# Altium PCB Laser.PcbDoc
Units mil, origin at the board's own origin, x right, y up, seen from the top; angles counter-clockwise.
Board outline 6560 x 3400 mil, 2 copper layers (Top Layer, Bottom Layer), stack 22.8 mil thick; 70 components, 105 nets, 239 pads, 6 vias.
Unrouted connection lines stored in the file: 4.
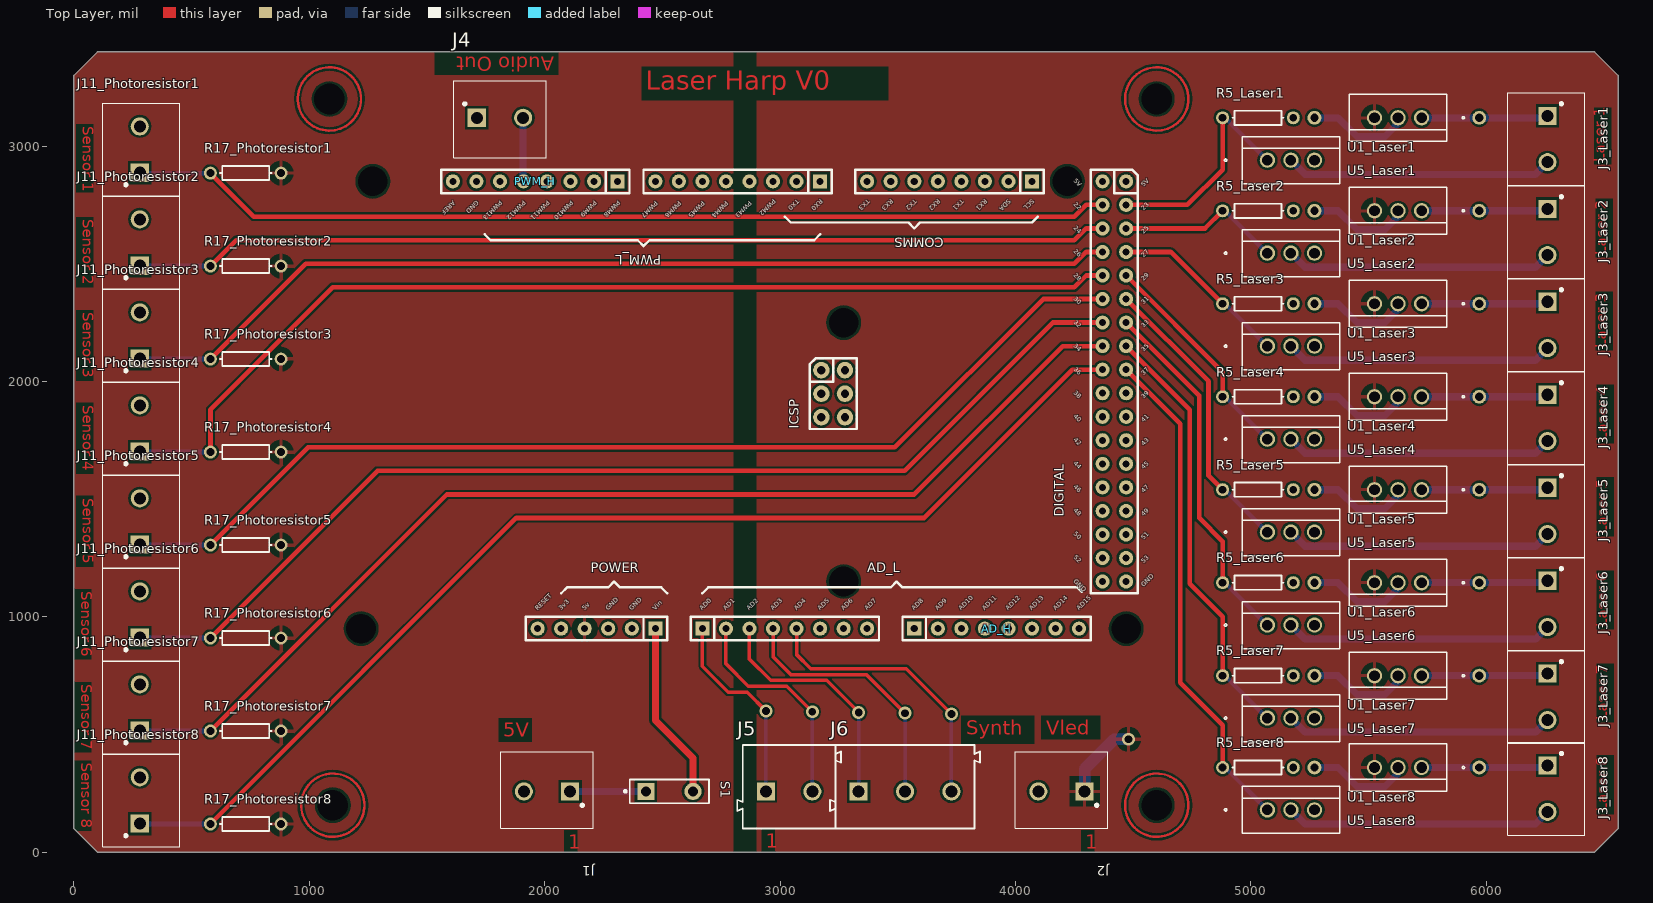
[diagram p0: Top Layer view]
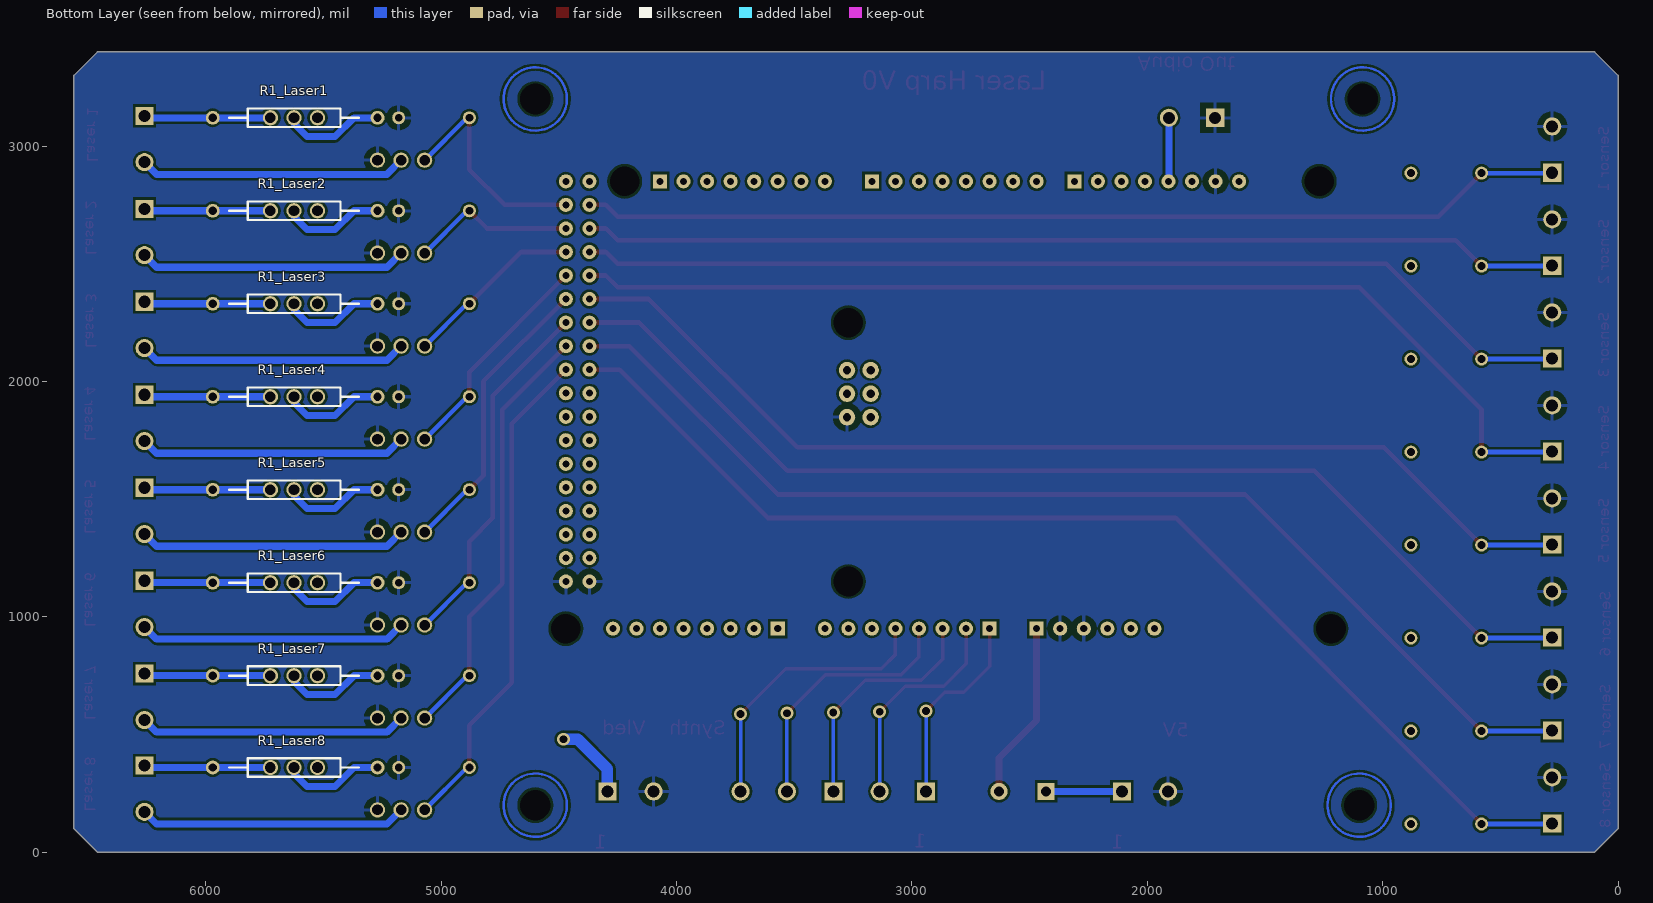
[diagram p1: Bottom Layer view, seen from below]
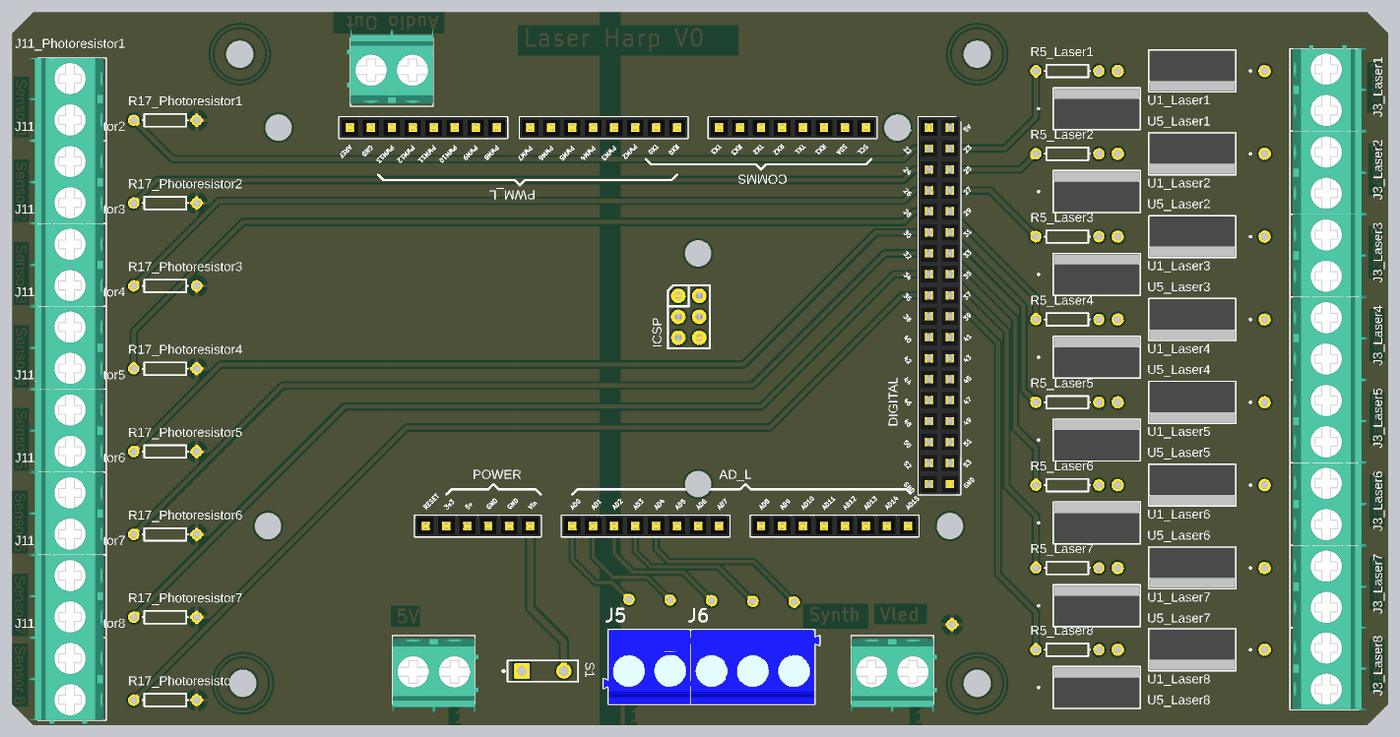
[diagram p2: 3D render of the assembled board from above, using the file's embedded part models]

## Layer stack, top to bottom
Top Solder: solder mask 0.4, Solder Resist, Dk 3.5
Top Layer: signal copper 1.4
Dielectric 1: dielectric 20, FR-4, Dk 4.8
Bottom Layer: signal copper 1.4
Bottom Solder: solder mask 0.4, Solder Resist, Dk 3.5

## Board outline
0,100 0,3300 100,3400 6460,3400 6560,3300 6560,100 6460,0 100,0

## Design rules (kind name [scope] priority, off if disabled: settings)
Clearance [All] p1: gap=10 ignorepadtopadclearanceinfootprint=FALSE except(0: Arc-Hole Track-Hole SMDPad-Hole THPad-Hole Via-Hole Fill-Hole Poly-Hole Region-Hole Text-Hole)
PolygonConnect [All] p1: connectstyle=Relief reliefconductorwidth=15 reliefentries=4 polygonreliefangle="90 Angle" airgapwidth=25
RoomDefinition U_uC [InComponentClass('U_uC')] p1: confinementstyle=ConfineIn formatcopy=TRUE lockcomponents=FALSE outline 950,1.47 4860,1.47 4860,3400 950,3400
RoomDefinition Photoresistor8 [InComponentClass('Photoresistor8')] p2: confinementstyle=ConfineIn formatcopy=TRUE lockcomponents=FALSE outline 0,0 1150,0 1150,550 0,550
RoomDefinition Photoresistor7 [InComponentClass('Photoresistor7')] p3: confinementstyle=ConfineIn formatcopy=TRUE lockcomponents=FALSE outline 0,395 1150,395 1150,945 0,945
RoomDefinition Photoresistor6 [InComponentClass('Photoresistor6')] p4: confinementstyle=ConfineIn formatcopy=TRUE lockcomponents=FALSE outline 0,790 1150,790 1150,1340 0,1340
RoomDefinition Photoresistor5 [InComponentClass('Photoresistor5')] p5: confinementstyle=ConfineIn formatcopy=TRUE lockcomponents=FALSE outline 0,1185 1150,1185 1150,1735 0,1735
RoomDefinition Photoresistor4 [InComponentClass('Photoresistor4')] p6: confinementstyle=ConfineIn formatcopy=TRUE lockcomponents=FALSE outline 0,1580 1150,1580 1150,2130 0,2130
RoomDefinition Photoresistor3 [InComponentClass('Photoresistor3')] p7: confinementstyle=ConfineIn formatcopy=TRUE lockcomponents=FALSE outline 0,1975 1150,1975 1150,2525 0,2525
RoomDefinition Photoresistor2 [InComponentClass('Photoresistor2')] p8: confinementstyle=ConfineIn formatcopy=TRUE lockcomponents=FALSE outline 0,2370 1150,2370 1150,2920 0,2920
RoomDefinition Photoresistor1 [InComponentClass('Photoresistor1')] p9: confinementstyle=ConfineIn formatcopy=TRUE lockcomponents=FALSE outline 0,2765 1150,2765 1150,3315 0,3315
RoomDefinition Laser_Harp_Top [InComponentClass('Laser_Harp_Top')] p10 off: confinementstyle=ConfineIn formatcopy=TRUE lockcomponents=FALSE outline -4900,-3950 -2900,-3950 -2900,-2950 -4900,-2950
RoomDefinition Laser8 [InComponentClass('Laser8')] p11: confinementstyle=ConfineIn formatcopy=TRUE lockcomponents=FALSE outline 4810,0 6570,0 6570,520 4810,520
RoomDefinition Laser7 [InComponentClass('Laser7')] p12: confinementstyle=ConfineIn formatcopy=TRUE lockcomponents=FALSE outline 4810,390 6570,390 6570,910 4810,910
RoomDefinition Laser6 [InComponentClass('Laser6')] p13: confinementstyle=ConfineIn formatcopy=TRUE lockcomponents=FALSE outline 4810,785 6570,785 6570,1305 4810,1305
RoomDefinition Laser5 [InComponentClass('Laser5')] p14: confinementstyle=ConfineIn formatcopy=TRUE lockcomponents=FALSE outline 4810,1180 6570,1180 6570,1700 4810,1700
RoomDefinition Laser4 [InComponentClass('Laser4')] p15: confinementstyle=ConfineIn formatcopy=TRUE lockcomponents=FALSE outline 4810,1575 6570,1575 6570,2095 4810,2095
RoomDefinition Laser3 [InComponentClass('Laser3')] p16: confinementstyle=ConfineIn formatcopy=TRUE lockcomponents=FALSE outline 4810,1970 6570,1970 6570,2490 4810,2490
RoomDefinition Laser2 [InComponentClass('Laser2')] p17: confinementstyle=ConfineIn formatcopy=TRUE lockcomponents=FALSE outline 4810,2365 6570,2365 6570,2885 4810,2885
RoomDefinition Laser1 [InComponentClass('Laser1')] p18: confinementstyle=ConfineIn formatcopy=TRUE lockcomponents=FALSE outline 4810,2760 6570,2760 6570,3280 4810,3280
RoutingVias [All] p1: holewidth=28 width=50 viastyle="Through Hole" minholewidth=28 minwidth=50 maxholewidth=40 maxwidth=60
SolderMaskExpansion [All] p1: expansion=4
Width [All] p1: maxlimit=50 minlimit=10 preferedwidth=20
30 further rules are at their usual default settings.

## Classes and differential pairs
net class SENSOR[8..1]: SENSOR1 SENSOR2 SENSOR3 SENSOR4 SENSOR5 SENSOR6 SENSOR7 SENSOR8
net class LASER[8..1]: LASER1 LASER2 LASER3 LASER4 LASER5 LASER6 LASER7 LASER8
channel class Photoresistors: Photoresistor1 Photoresistor2 Photoresistor3 Photoresistor4 Photoresistor5 Photoresistor6 Photoresistor7 Photoresistor8
component class U_uC: AD_H AD_L COMMS DIGITAL ICSP J4 J5 J6 POWER PWM_H PWM_L
component class Photoresistor8: J11_Photoresistor8 R17_Photoresistor8
component class Photoresistor7: J11_Photoresistor7 R17_Photoresistor7
component class Photoresistor6: J11_Photoresistor6 R17_Photoresistor6
component class Photoresistor5: J11_Photoresistor5 R17_Photoresistor5
component class Photoresistor4: J11_Photoresistor4 R17_Photoresistor4
component class Photoresistor3: J11_Photoresistor3 R17_Photoresistor3
component class Photoresistor2: J11_Photoresistor2 R17_Photoresistor2
component class Photoresistor1: J11_Photoresistor1 R17_Photoresistor1
channel class Lasers: Laser1 Laser2 Laser3 Laser4 Laser5 Laser6 Laser7 Laser8
component class Laser8: J3_Laser8 R1_Laser8 R5_Laser8 U1_Laser8 U5_Laser8
component class Laser7: J3_Laser7 R1_Laser7 R5_Laser7 U1_Laser7 U5_Laser7
component class Laser6: J3_Laser6 R1_Laser6 R5_Laser6 U1_Laser6 U5_Laser6
component class Laser5: J3_Laser5 R1_Laser5 R5_Laser5 U1_Laser5 U5_Laser5
component class Laser4: J3_Laser4 R1_Laser4 R5_Laser4 U1_Laser4 U5_Laser4
component class Laser3: J3_Laser3 R1_Laser3 R5_Laser3 U1_Laser3 U5_Laser3
component class Laser2: J3_Laser2 R1_Laser2 R5_Laser2 U1_Laser2 U5_Laser2
component class Laser1: J3_Laser1 R1_Laser1 R5_Laser1 U1_Laser1 U5_Laser1
component class Laser_Harp_Top: J1 J2 R? S1 U?

## Components (designator, comment, footprint, x,y, rotation, side; value= is the part's Value field where it differs from the comment)
AD_H "AD_H" "Header 8x1 8.5mm" 3570,950 r0 top locked
AD_L "AD_L" "Header 8x1 8.5mm" 2670,950 r0 top locked
COMMS "Communication" "Header 8x1 8.5mm" 4070,2850 r180 top
DIGITAL "IO_36" "HEADER 36X 8MM" 4470,2850 r270 top locked
ICSP "ICSP" ICSP 3175.51,2048.03 r0 top locked
J1 "1935161" PHOENIX_1935161 2010,258.43 r180 top
J2 "1935161" PHOENIX_1935161 4195.36,258.43 r180 top
J3_Laser1 "1935161" PHOENIX_1935161 6260,3030 r270 top (schematic designator J3)
J3_Laser2 "1935161" PHOENIX_1935161 6260,2635 r270 top (schematic designator J3)
J3_Laser3 "1935161" PHOENIX_1935161 6260,2240 r270 top (schematic designator J3)
J3_Laser4 "1935161" PHOENIX_1935161 6260,1845 r270 top (schematic designator J3)
J3_Laser5 "1935161" PHOENIX_1935161 6260,1450 r270 top (schematic designator J3)
J3_Laser6 "1935161" PHOENIX_1935161 6260,1055 r270 top (schematic designator J3)
J3_Laser7 "1935161" PHOENIX_1935161 6260,660 r270 top (schematic designator J3)
J3_Laser8 "1935161" PHOENIX_1935161 6260,270 r270 top (schematic designator J3)
J4 "1935161" PHOENIX_1935161 1810,3120 r0 top
J5 "691101710002" 691101710002 3038.43,278.11 r0 top
J6 "691101710003" 691101710003 3530.85,278.11 r0 top
J11_Photoresistor1 "1935161" PHOENIX_1935161 280,2985 r90 top (schematic designator J11)
J11_Photoresistor2 "1935161" PHOENIX_1935161 280,2590 r90 top (schematic designator J11)
J11_Photoresistor3 "1935161" PHOENIX_1935161 280,2195 r90 top (schematic designator J11)
J11_Photoresistor4 "1935161" PHOENIX_1935161 280,1800 r90 top (schematic designator J11)
J11_Photoresistor5 "1935161" PHOENIX_1935161 280,1405 r90 top (schematic designator J11)
J11_Photoresistor6 "1935161" PHOENIX_1935161 280,1010 r90 top (schematic designator J11)
J11_Photoresistor7 "1935161" PHOENIX_1935161 280,615 r90 top (schematic designator J11)
J11_Photoresistor8 "1935161" PHOENIX_1935161 280,220 r90 top (schematic designator J11)
POWER "POWER" "Header 6x1 8.5mm" 2470,950 r180 top locked
PWM_H "PWM_H" "Header 8x1 8.5mm" 2310,2850 r180 top locked
PWM_L "PWM_L" "Header 8x1 8.5mm" 3170,2850 r180 top locked
R1_Laser1 "3.6" 3.6_R 5270,3120 r0 bottom (schematic designator R1)
R1_Laser2 "3.6" 3.6_R 5270,2725 r0 bottom (schematic designator R1)
R1_Laser3 "3.6" 3.6_R 5270,2330 r0 bottom (schematic designator R1)
R1_Laser4 "3.6" 3.6_R 5270,1935 r0 bottom (schematic designator R1)
R1_Laser5 "3.6" 3.6_R 5270,1540 r0 bottom (schematic designator R1)
R1_Laser6 "3.6" 3.6_R 5270,1145 r0 bottom (schematic designator R1)
R1_Laser7 "3.6" 3.6_R 5270,750 r0 bottom (schematic designator R1)
R1_Laser8 "3.6" 3.6_R 5270,360 r0 bottom (schematic designator R1)
R5_Laser1 "Res1" AXIAL-0.3 5030,3120 r180 top value=10k (schematic designator R5)
R5_Laser2 "Res1" AXIAL-0.3 5030,2725 r180 top value=10k (schematic designator R5)
R5_Laser3 "Res1" AXIAL-0.3 5030,2330 r180 top value=10k (schematic designator R5)
R5_Laser4 "Res1" AXIAL-0.3 5030,1935 r180 top value=10k (schematic designator R5)
R5_Laser5 "Res1" AXIAL-0.3 5030,1540 r180 top value=10k (schematic designator R5)
R5_Laser6 "Res1" AXIAL-0.3 5030,1145 r180 top value=10k (schematic designator R5)
R5_Laser7 "Res1" AXIAL-0.3 5030,750 r180 top value=10k (schematic designator R5)
R5_Laser8 "Res1" AXIAL-0.3 5030,360 r180 top value=10k (schematic designator R5)
R17_Photoresistor1 "Res1" AXIAL-0.3 730,2885 r0 top value=100k (schematic designator R17)
R17_Photoresistor2 "Res1" AXIAL-0.3 730,2490 r0 top value=100k (schematic designator R17)
R17_Photoresistor3 "Res1" AXIAL-0.3 730,2095 r0 top value=100k (schematic designator R17)
R17_Photoresistor4 "Res1" AXIAL-0.3 730,1700 r0 top value=100k (schematic designator R17)
R17_Photoresistor5 "Res1" AXIAL-0.3 730,1305 r0 top value=100k (schematic designator R17)
R17_Photoresistor6 "Res1" AXIAL-0.3 730,910 r0 top value=100k (schematic designator R17)
R17_Photoresistor7 "Res1" AXIAL-0.3 730,515 r0 top value=100k (schematic designator R17)
R17_Photoresistor8 "Res1" AXIAL-0.3 730,120 r0 top value=100k (schematic designator R17)
S1 "SW-SPST" SPST-2 2530,258.43 r0 top
U1_Laser1 "LM317TG" TO-220AB 5525,3120 r180 top value=Value (schematic designator U1)
U1_Laser2 "LM317TG" TO-220AB 5525,2725 r180 top value=Value (schematic designator U1)
U1_Laser3 "LM317TG" TO-220AB 5525,2330 r180 top value=Value (schematic designator U1)
U1_Laser4 "LM317TG" TO-220AB 5525,1935 r180 top value=Value (schematic designator U1)
U1_Laser5 "LM317TG" TO-220AB 5525,1540 r180 top value=Value (schematic designator U1)
U1_Laser6 "LM317TG" TO-220AB 5525,1145 r180 top value=Value (schematic designator U1)
U1_Laser7 "LM317TG" TO-220AB 5525,750 r180 top value=Value (schematic designator U1)
U1_Laser8 "LM317TG" TO-220AB 5525,360 r180 top value=Value (schematic designator U1)
U5_Laser1 "IRFZ46NPBF" TO-220AB 5270,2940 r0 top value=Value (schematic designator U5)
U5_Laser2 "IRFZ46NPBF" TO-220AB 5270,2545 r0 top value=Value (schematic designator U5)
U5_Laser3 "IRFZ46NPBF" TO-220AB 5270,2150 r0 top value=Value (schematic designator U5)
U5_Laser4 "IRFZ46NPBF" TO-220AB 5270,1755 r0 top value=Value (schematic designator U5)
U5_Laser5 "IRFZ46NPBF" TO-220AB 5270,1360 r0 top value=Value (schematic designator U5)
U5_Laser6 "IRFZ46NPBF" TO-220AB 5270,965 r0 top value=Value (schematic designator U5)
U5_Laser7 "IRFZ46NPBF" TO-220AB 5270,570 r0 top value=Value (schematic designator U5)
U5_Laser8 "IRFZ46NPBF" TO-220AB 5270,180 r0 top value=Value (schematic designator U5)

## Footprints (in the part's own frame and the unit in brackets; to place one, negate y for a bottom-side part, rotate by r counter-clockwise, add the part's x,y. Pads: shape width x height; smd on the part's side, far side on the other; paste and mask are expansions set on the pad)
3.6_R [mm] "PR01000103608JR500"
  round 1.5 hole 0.9: 1(0,0) 2(17.78,0)
  silkscreen extent 2,-1 16,1
691101710002 [mm] "5,00mm - modular - blue - Horizontal entry with pressure clamp - 12,6mm height - 02p"
  rect 1.95x1.95 hole 1.3: 1(-2.5,-0.5)
  round 1.95 hole 1.3: 2(2.5,-0.5)
  silkscreen extent -5.6,-4.5 5.6,4.5, body extent -5.6,-4.5 5.6,4.5, height 12.65
691101710003 [mm] "5,00mm - modular - blue - Horizontal entry with pressure clamp - 12,6mm height - 03p"
  rect 1.95x1.95 hole 1.3: 1(-5,-0.5)
  round 1.95 hole 1.3: 2(0,-0.5) 3(5,-0.5)
  silkscreen extent -8.1,-4.5 8.1,4.5, body extent -8.1,-4.5 8.1,4.5, height 12.65
AXIAL-0.3 [mm] "Axial Device, Thru-Hole; 2 Leads; 0.3 in Pin Spacing"
  round 1.4 hole 0.85: 1(-3.81,0) 2(3.81,0)
  silkscreen extent -2.77,-0.76 2.77,0.76
"Header 6x1 8.5mm" [mil] "Stackable 6 pin header"
  rect 60x60 hole 30: 1(0,0)
  round 60 hole 30: 2(100,0) 3(200,0) 4(300,0) 5(400,0) 6(500,0)
  silkscreen extent -50,-50 550,50, body extent -50,-50 550,50, height 335
"Header 8x1 8.5mm" [mil] "Stackable 8 pin header"
  rect 60x60 hole 30: 1(0,0)
  round 60 hole 30: 2(100,0) 3(200,0) 4(300,0) 5(400,0) 6(500,0) 7(600,0) 8(700,0)
  silkscreen extent -50,-50 750,50, body extent -50,-50 750,50, height 335
"HEADER 36X 8MM" [mil] "Stackable 10 pin header"
  round 60 hole 30: 1(0,0) 2(0,-100) 3(100,0) 4(100,-100) 5(200,0) 6(200,-100) 7(300,0) 8(300,-100) 9(400,0) 10(400,-100) 11(500,0) 12(500,-100) 13(600,0) 14(600,-100) 15(700,0) 16(700,-100) 17(800,0) 18(800,-100) 19(900,-100) 20(900,0) 21(1000,0) 22(1000,-100) 23(1100,0) 24(1100,-100) 25(1200,0) 26(1200,-100) 27(1300,0) 28(1300,-100) 29(1400,0) 30(1400,-100) 31(1500,0) 32(1500,-100) 33(1600,0) 34(1600,-100) 35(1700,0) 36(1700,-100)
  silkscreen extent -50,-150 1750,50, body extent -50,-150 1750,50, height 335
ICSP [mil]
  round 70 hole 35.43: 1(0,0) 2(100,0) 3(0,-100) 4(100,-100) 5(0,-200) 6(100,-200)
  silkscreen extent -50,-250 150,50, body extent -50,-250 150,50, height 485
PHOENIX_1935161 [mm]
  rect 1.95x1.95 hole 1.3: 1(-2.5,0)
  round 1.95 hole 1.3: 2(2.5,0)
  silkscreen extent -5,-4.3 5,4, body extent -5.4,-3.96 5,5.04, height 12.05
SPST-2 [mm] "Circuit Breaker; 2 Leads"
  rect 1.85x1.85 hole 1.1: 1(-2.54,0)
  round 1.85 hole 1.1: 2(2.54,0)
  silkscreen extent -4.89,-1.27 4.28,1.27
TO-220AB [mil]
  round 65 hole 45 mask+0: 1(-200,0) 2(-100,0) 3(0,0)
  silkscreen extent -382,-100 108,100, body extent -303,-95 103,95, height 865

## Part data
AD_H PWM_L: Supplier Part Number 1=2698940, Supplier 1=Arrow, Supplier 2=Arrow, Supplier 3=Digi-Key, Supplier 4=Arrow, Supplier Part Number 2=2698939, Supplier Part Number 3=SAM1198-08-ND, Supplier Part Number 4=2698925
AD_L COMMS PWM_H: Supplier Part Number 1=SAM1198-08-ND, Supplier 1=Digi-Key, Supplier 2=Arrow, Supplier 3=Arrow, Supplier 4=Arrow
  AD_L: Supplier 5=Arrow, Supplier Part Number 2=2698939, Supplier Part Number 3=2698940, Supplier Part Number 4=43085273, Supplier Part Number 5=2698925
  COMMS PWM_H: Supplier Part Number 2=2698940, Supplier Part Number 3=2698939, Supplier Part Number 4=2698925
DIGITAL: Supplier Part Number 1=SAM1196-18-ND, Supplier 1=Digi-Key, Supplier 2=Arrow, Supplier 3=Arrow, Supplier 4=Arrow, Supplier 5=Arrow, Supplier Part Number 2=48117090, Supplier Part Number 3=46093326, Supplier Part Number 4=2698278, Supplier Part Number 5=2698268
ICSP: Supplier Part Number 1=SAM1185-06-ND, Supplier 1=Digi-Key, Supplier 2=Arrow, Supplier 3=Arrow, Supplier 4=Arrow, Supplier 5=Digi-Key, Supplier Part Number 2=2699117, Supplier Part Number 3=43862781, Supplier Part Number 4=2699091, Supplier Part Number 5=SAM1196-06-ND
J1 J2 J3_Laser1 J3_Laser2 J3_Laser3 J3_Laser4 J3_Laser5 J3_Laser6 J3_Laser7 J3_Laser8 J4 J11_Photoresistor1 J11_Photoresistor2 J11_Photoresistor3 J11_Photoresistor4 J11_Photoresistor5 J11_Photoresistor6 J11_Photoresistor7 J11_Photoresistor8: "Conn Terminal Blocks 2 POS 5mm Solder ST Thru-Hole 16A", Package=None, Digi-Key_Part_Number=277-1667-ND, Digi-Key_Purchase_URL=https://www.digikey.com/product-detail/en/phoenix-contact/1935161/277-1667-ND/568614?utm_source=snapeda&utm_medium=aggregator&utm_campaign=symbol, MF="Phoenix Contact", MP=1935161, SnapEDA_Link=https://www.snapeda.com/parts/1935161/Phoenix%20Contact/view-part/?ref=snap
J5: "Series 101 - 5.00 mm Horizontal Entry Modular with Pressure Clamp WR-TBL, 2 pin", Operating Temperature="-40 to 105 degC", ComponentLink1Description=Manufacturer, ComponentLink1URL=http://www.we-online.de, ComponentLink2Description=Datasheet, ComponentLink2URL=http://katalog.we-online.de/em/datasheet/6911017100xx.pdf, Mounting Technology=THT, Packaging=Box, Part Number=691101710002, Pin Number=2, Pitch="5.00 mm", Published Date="May 2018", Publisher="Wurth Elektronik"
J6: "Series 101 - 5.00 mm Horizontal Entry Modular with Pressure Clamp WR-TBL, 3 pin", Operating Temperature="-40 to 105 degC", ComponentLink1Description=Manufacturer, ComponentLink1URL=http://www.we-online.de, ComponentLink2Description=Datasheet, ComponentLink2URL=http://katalog.we-online.de/em/datasheet/6911017100xx.pdf, Mounting Technology=THT, Packaging=Box, Part Number=691101710003, Pin Number=3, Pitch="5.00 mm", Published Date="May 2018", Publisher="Wurth Elektronik"
POWER: Supplier Part Number 1=52553843, Supplier 1=Arrow, Supplier 2=Arrow, Supplier 3=Digi-Key, Supplier 4=Arrow, Supplier 5=Arrow, Supplier Part Number 2=2699075, Supplier Part Number 3=SAM1198-06-ND, Supplier Part Number 4=2699089, Supplier Part Number 5=2699088
R5_Laser1 R5_Laser2 R5_Laser3 R5_Laser4 R5_Laser5 R5_Laser6 R5_Laser7 R5_Laser8 R17_Photoresistor1 R17_Photoresistor2 R17_Photoresistor3 R17_Photoresistor4 R17_Photoresistor5 R17_Photoresistor6 R17_Photoresistor7 R17_Photoresistor8: "Resistor", LatestRevisionDate=17-Jul-2002, LatestRevisionNote="Re-released for DXP Platform.", PackageReference=AXIAL-0.3, Published=8-Jun-2000, Publisher="Altium Limited"
S1: "Single-Pole, Single-Throw Switch", LatestRevisionDate=17-Jul-2002, LatestRevisionNote="Re-released for DXP Platform.", PackageReference=SPST-2, Published=24-Mar-1999, Publisher="Altium Limited"
U1_Laser1 U1_Laser2 U1_Laser3 U1_Laser4 U1_Laser5 U1_Laser6 U1_Laser7 U1_Laser8 U5_Laser1 U5_Laser2 U5_Laser3 U5_Laser4 U5_Laser5 U5_Laser6 U5_Laser7 U5_Laser8: "Imported", Built_By=EMA_UL_Team, C="Copyright (C) 2015 Accelerated Designs. All rights reserved", RefDes=RefDes, Type=DEV
  U1_Laser1 U1_Laser2 U1_Laser3 U1_Laser4 U1_Laser5 U1_Laser6 U1_Laser7 U1_Laser8: Manufacturer_Part_Number=LM317TG, Vendor="ON Semiconductor"
  U5_Laser1 U5_Laser2 U5_Laser3 U5_Laser4 U5_Laser5 U5_Laser6 U5_Laser7 U5_Laser8: Manufacturer_Part_Number=IRFZ46NPBF, Vendor=LITE-ON

## Free pads (board coordinates)
  round 60 hole 130: 0(1085.58,3200) 0(4600,200) 0(4600,3200) 1(1100,200)
  round 62.99 hole 125.98: 0(1220,950) 0(1270,2850) 0(3270,1150) 0(3270,2250) 0(4220,2850) 0(4470,950)

## Via types
v1: diameter 55, hole 33, Top Layer to Bottom Layer, 6 vias

## Nets (pads, with @x,y where several pads share a name; then routed paths per layer and width w, separated by ;. In a path a pad name is that pad's centre, name@x,y a point inside that pad or via, vN(x,y) a via of type N, cw(c..) or ccw(c..) an arc to the next point about the centre after c; other vN are vias at no path point)
3V3: POWER.5
5V: DIGITAL.1 DIGITAL.2 ICSP.2 POWER.4 R17_Photoresistor1.2 R17_Photoresistor2.2 R17_Photoresistor3.2 R17_Photoresistor4.2 R17_Photoresistor5.2 R17_Photoresistor6.2 R17_Photoresistor7.2 R17_Photoresistor8.2
+5V: POWER.1 S1.2 | length 757.8
  Top Layer w30: POWER.1 2470,560 2630,400 S1.2
AD0: AD_L.1 J5.1 | length 850.3
  Top Layer w15: AD_L.1 2670,790 2780,680 2860,680 v1(2940,600)
  Bottom Layer w15: J5.1 v1(2940,600)
AD1: AD_L.2 J5.2 | length 939.4
  Top Layer w15: AD_L.2 2770,800 2865,705 3028.7,705 v1(3136.85,596.85)
  Bottom Layer w15: J5.2 v1(3136.85,596.85)
AD2: AD_L.3 J6.1 | length 1023.2
  Top Layer w15: AD_L.3 2870,820 2960,730 3197.98,730 v1(3333.99,593.99)
  Bottom Layer w15: J6.1 v1(3333.99,593.99)
AD3: AD_L.4 J6.2 | length 1112.3
  Top Layer w15: AD_L.4 2970,830 3045,755 3366.68,755 v1(3530.84,590.84)
  Bottom Layer w15: J6.2 v1(3530.84,590.84)
AD4: AD_L.5 J6.3 | length 1201.5
  Top Layer w15: AD_L.5 3070,840 3130,780 3535.38,780 v1(3727.69,587.69)
  Bottom Layer w15: J6.3 v1(3727.69,587.69)
AD5: AD_L.6
AD6: AD_L.7
AD7: AD_L.8
AD8: AD_H.1
AD9: AD_H.2
AD10: AD_H.3
AD11: AD_H.4
AD12: AD_H.5
AD13: AD_H.6
AD14: AD_H.7
AD15: AD_H.8
AREF: PWM_H.8
GND: DIGITAL.35 DIGITAL.36 ICSP.6 J1.2 J2.2 J4.1 J11_Photoresistor1.2 J11_Photoresistor2.2 J11_Photoresistor3.2 J11_Photoresistor4.2 J11_Photoresistor5.2 J11_Photoresistor6.2 J11_Photoresistor7.2 J11_Photoresistor8.2 POWER.2 POWER.3 PWM_H.7 R5_Laser1.1 R5_Laser2.1 R5_Laser3.1 R5_Laser4.1 R5_Laser5.1 R5_Laser6.1 R5_Laser7.1 R5_Laser8.1 U5_Laser1.3 U5_Laser2.3 U5_Laser3.3 U5_Laser4.3 U5_Laser5.3 U5_Laser6.3 U5_Laser7.3 U5_Laser8.3
IO38: DIGITAL.20
IO39: DIGITAL.19
IO40: DIGITAL.22
IO41: DIGITAL.21
IO42: DIGITAL.24
IO43: DIGITAL.23
IO44: DIGITAL.26
IO45: DIGITAL.25
IO46: DIGITAL.28
IO47: DIGITAL.27
IO48: DIGITAL.30
IO49: DIGITAL.29
IO50: DIGITAL.32
IO51: DIGITAL.31
IO52: DIGITAL.34
IO53: DIGITAL.33
LASER1: DIGITAL.3 R5_Laser1.2 U5_Laser1.1 | length 956.7
  Top Layer w20: DIGITAL.3 4730,2750 4880,2900 R5_Laser1.2
  Bottom Layer w20: R5_Laser1.2 4890,3120 U5_Laser1.1
LASER2: DIGITAL.5 R5_Laser2.2 U5_Laser2.1 | length 705.6
  Top Layer w20: DIGITAL.5 4805,2650 R5_Laser2.2
  Bottom Layer w20: R5_Laser2.2 4890,2725 U5_Laser2.1
LASER3: DIGITAL.7 R5_Laser3.2 U5_Laser3.1 | length 765.7
  Top Layer w20: DIGITAL.7 4660,2550 R5_Laser3.2
  Bottom Layer w20: R5_Laser3.2 4890,2330 U5_Laser3.1
LASER4: DIGITAL.9 R5_Laser4.2 U5_Laser4.1 | length 949.4
  Top Layer w20: DIGITAL.9 4880,2040 R5_Laser4.2
  Bottom Layer w20: R5_Laser4.2 4890,1935 U5_Laser4.1
LASER5: DIGITAL.11 R5_Laser5.2 U5_Laser5.1 | length 1244.4
  Top Layer w20: DIGITAL.11 4820,2000 4820,1600 R5_Laser5.2
  Bottom Layer w20: R5_Laser5.2 4890,1540 U5_Laser5.1
LASER6: DIGITAL.13 R5_Laser6.2 U5_Laser6.1 | length 1539.4
  Top Layer w20: DIGITAL.13 4780,1940 4780,1420 4880,1320 R5_Laser6.2
  Bottom Layer w20: R5_Laser6.2 4890,1145 U5_Laser6.1
LASER7: DIGITAL.15 R5_Laser7.2 U5_Laser7.1 | length 1834.4
  Top Layer w20: DIGITAL.15 4740,1880 4740,1140 4880,1000 R5_Laser7.2
  Bottom Layer w20: R5_Laser7.2 4890,750 U5_Laser7.1
LASER8: DIGITAL.17 R5_Laser8.2 U5_Laser8.1 | length 2124.4
  Top Layer w20: DIGITAL.17 4700,1820 4700,720 4880,540 R5_Laser8.2
  Bottom Layer w20: R5_Laser8.2 4890,360 U5_Laser8.1
MISO: ICSP.1
MOSI: ICSP.4
NetJ1_1: J1.1 S1.1 | length 320
  Bottom Layer w30: J1.1@2110,258.43 S1.1
NetJ3_Laser1_1: J3_Laser1.1 R1_Laser1.2 U1_Laser1.1 | length 538.5
  Bottom Layer w30: U1_Laser1.1 R1_Laser1.2 6251.57,3120 J3_Laser1.1
NetJ3_Laser1_2: J3_Laser1.2 U5_Laser1.2 | length 1136.2
  Bottom Layer w30: U5_Laser1.2 5230,2880 6208.43,2880 J3_Laser1.2
NetJ3_Laser2_1: J3_Laser2.1 R1_Laser2.2 U1_Laser2.1 | length 538.5
  Bottom Layer w30: U1_Laser2.1 R1_Laser2.2 6251.57,2725 J3_Laser2.1
NetJ3_Laser2_2: J3_Laser2.2 U5_Laser2.2 | length 1136.2
  Bottom Layer w30: U5_Laser2.2 5230,2485 6208.43,2485 J3_Laser2.2
NetJ3_Laser3_1: J3_Laser3.1 R1_Laser3.2 U1_Laser3.1 | length 538.5
  Bottom Layer w30: U1_Laser3.1 R1_Laser3.2 6251.57,2330 J3_Laser3.1
NetJ3_Laser3_2: J3_Laser3.2 U5_Laser3.2 | length 1136.2
  Bottom Layer w30: U5_Laser3.2 5230,2090 6208.43,2090 J3_Laser3.2
NetJ3_Laser4_1: J3_Laser4.1 R1_Laser4.2 U1_Laser4.1 | length 538.5
  Bottom Layer w30: U1_Laser4.1 R1_Laser4.2 6251.57,1935 J3_Laser4.1
NetJ3_Laser4_2: J3_Laser4.2 U5_Laser4.2 | length 1136.2
  Bottom Layer w30: U5_Laser4.2 5230,1695 6208.43,1695 J3_Laser4.2
NetJ3_Laser5_1: J3_Laser5.1 R1_Laser5.2 U1_Laser5.1 | length 538.5
  Bottom Layer w30: U1_Laser5.1 R1_Laser5.2 6251.57,1540 J3_Laser5.1
NetJ3_Laser5_2: J3_Laser5.2 U5_Laser5.2 | length 1136.2
  Bottom Layer w30: U5_Laser5.2 5230,1300 6208.43,1300 J3_Laser5.2
NetJ3_Laser6_1: J3_Laser6.1 R1_Laser6.2 U1_Laser6.1 | length 538.5
  Bottom Layer w30: U1_Laser6.1 R1_Laser6.2 6251.57,1145 J3_Laser6.1
NetJ3_Laser6_2: J3_Laser6.2 U5_Laser6.2 | length 1136.2
  Bottom Layer w30: U5_Laser6.2 5230,905 6208.43,905 J3_Laser6.2
NetJ3_Laser7_1: J3_Laser7.1 R1_Laser7.2 U1_Laser7.1 | length 538.5
  Bottom Layer w30: U1_Laser7.1 R1_Laser7.2 6251.57,750 J3_Laser7.1
NetJ3_Laser7_2: J3_Laser7.2 U5_Laser7.2 | length 1136.2
  Bottom Layer w30: U5_Laser7.2 5230,510 6208.43,510 J3_Laser7.2
NetJ3_Laser8_1: J3_Laser8.1 R1_Laser8.2 U1_Laser8.1 | length 538.5
  Bottom Layer w30: U1_Laser8.1 R1_Laser8.2 6251.57,360 J3_Laser8.1
NetJ3_Laser8_2: J3_Laser8.2 U5_Laser8.2 | length 1136.2
  Bottom Layer w30: U5_Laser8.2 5230,120 6208.43,120 J3_Laser8.2
NetR1_Laser1_1: R1_Laser1.1 U1_Laser1.2 | length 435.9
  Bottom Layer w30: R1_Laser1.1 5370,3120 5450,3040 5570,3040 5625,3095 U1_Laser1.2
NetR1_Laser2_1: R1_Laser2.1 U1_Laser2.2 | length 435.9
  Bottom Layer w30: R1_Laser2.1 5370,2725 5450,2645 5570,2645 5625,2700 U1_Laser2.2
NetR1_Laser3_1: R1_Laser3.1 U1_Laser3.2 | length 435.9
  Bottom Layer w30: R1_Laser3.1 5370,2330 5450,2250 5570,2250 5625,2305 U1_Laser3.2
NetR1_Laser4_1: R1_Laser4.1 U1_Laser4.2 | length 435.9
  Bottom Layer w30: R1_Laser4.1 5370,1935 5450,1855 5570,1855 5625,1910 U1_Laser4.2
NetR1_Laser5_1: R1_Laser5.1 U1_Laser5.2 | length 435.9
  Bottom Layer w30: R1_Laser5.1 5370,1540 5450,1460 5570,1460 5625,1515 U1_Laser5.2
NetR1_Laser6_1: R1_Laser6.1 U1_Laser6.2 | length 435.9
  Bottom Layer w30: R1_Laser6.1 5370,1145 5450,1065 5570,1065 5625,1120 U1_Laser6.2
NetR1_Laser7_1: R1_Laser7.1 U1_Laser7.2 | length 435.9
  Bottom Layer w30: R1_Laser7.1 5370,750 5450,670 5570,670 5625,725 U1_Laser7.2
NetR1_Laser8_1: R1_Laser8.1 U1_Laser8.2 | length 435.9
  Bottom Layer w30: R1_Laser8.1 5370,360 5450,280 5570,280 5625,335 U1_Laser8.2
PWM2: PWM_L.3
PWM3: PWM_L.4
PWM4: PWM_L.5
PWM5: PWM_L.6
PWM6: PWM_L.7
PWM7: PWM_L.8
PWM8: PWM_H.1
PWM9: PWM_H.2
PWM10: PWM_H.3
PWM11: PWM_H.4
PWM12: J4.2 PWM_H.5 | length 270.7
  Top Layer w15: PWM_H.5@1908.43,2851.57 PWM_H.5
  Bottom Layer w30: PWM_H.5@1908.43,2851.57 J4.2
PWM13: PWM_H.6
RESET: ICSP.5 POWER.6
RX0: PWM_L.1
RX1: COMMS.3
RX2: COMMS.5
RX3: COMMS.7
SCK: ICSP.3
SCL: COMMS.1
SDA: COMMS.2
SENSOR1: DIGITAL.4 J11_Photoresistor1.1 R17_Photoresistor1.1 | length 4188
  Top Layer w20: J11_Photoresistor1.1 J11_Photoresistor1.1@281.58,2885 ; R17_Photoresistor1.1 765,2700 4250,2700 4300,2750 DIGITAL.4
  Bottom Layer w20: J11_Photoresistor1.1@281.58,2885 R17_Photoresistor1.1
SENSOR2: DIGITAL.6 J11_Photoresistor2.1 R17_Photoresistor2.1 | length 4156.9
  Top Layer w20: J11_Photoresistor2.1 J11_Photoresistor2.1@281.58,2490 ; R17_Photoresistor2.1 690,2600 4250,2600 4300,2650 DIGITAL.6
  Bottom Layer w20: J11_Photoresistor2.1@281.58,2490 R17_Photoresistor2.1
SENSOR3: DIGITAL.8 J11_Photoresistor3.1 R17_Photoresistor3.1 | length 4279.1
  Top Layer w20: J11_Photoresistor3.1 J11_Photoresistor3.1@281.58,2095 ; R17_Photoresistor3.1 985,2500 4250,2500 4300,2550 DIGITAL.8
  Bottom Layer w20: J11_Photoresistor3.1@281.58,2095 R17_Photoresistor3.1
SENSOR4: DIGITAL.10 J11_Photoresistor4.1 R17_Photoresistor4.1 | length 4506.8
  Top Layer w20: J11_Photoresistor4.1 J11_Photoresistor4.1@281.58,1700 ; R17_Photoresistor4.1 580,1880 1100,2400 4250,2400 4300,2450 DIGITAL.10
  Bottom Layer w20: J11_Photoresistor4.1@281.58,1700 R17_Photoresistor4.1
SENSOR5: DIGITAL.12 J11_Photoresistor5.1 R17_Photoresistor5.1 | length 4523.5
  Top Layer w20: J11_Photoresistor5.1 J11_Photoresistor5.1@281.58,1305 ; R17_Photoresistor5.1 995,1720 3487.31,1720 4117.31,2350 DIGITAL.12
  Bottom Layer w20: J11_Photoresistor5.1@281.58,1305 R17_Photoresistor5.1
SENSOR6: DIGITAL.14 J11_Photoresistor6.1 R17_Photoresistor6.1 | length 4645.7
  Top Layer w20: J11_Photoresistor6.1 J11_Photoresistor6.1@281.58,910 ; R17_Photoresistor6.1 1290,1620 3528.73,1620 4158.73,2250 DIGITAL.14
  Bottom Layer w20: J11_Photoresistor6.1@281.58,910 R17_Photoresistor6.1
SENSOR7: DIGITAL.16 J11_Photoresistor7.1 R17_Photoresistor7.1 | length 4767.9
  Top Layer w20: J11_Photoresistor7.1 J11_Photoresistor7.1@281.58,515 ; R17_Photoresistor7.1 1585,1520 3570.15,1520 4200.15,2150 DIGITAL.16
  Bottom Layer w20: J11_Photoresistor7.1@281.58,515 R17_Photoresistor7.1
SENSOR8: DIGITAL.18 J11_Photoresistor8.1 R17_Photoresistor8.1 | length 4890.1
  Top Layer w20: J11_Photoresistor8.1 J11_Photoresistor8.1@281.58,120 ; R17_Photoresistor8.1 1880,1420 3611.57,1420 4241.57,2050 DIGITAL.18
  Bottom Layer w20: J11_Photoresistor8.1@281.58,120 R17_Photoresistor8.1
TX0: PWM_L.2
TX1: COMMS.4
TX2: COMMS.6
TX3: COMMS.8
Vled: J2.1 U1_Laser1.3 U1_Laser2.3 U1_Laser3.3 U1_Laser4.3 U1_Laser5.3 U1_Laser6.3 U1_Laser7.3 U1_Laser8.3 | length 333.9
  Bottom Layer w50: J2.1 4293.79,353.79 4420,480 v1(4480,480)
copper on no net: | length 6756.6
  Top Layer w10: 1220,3200 ccw(c1085.58,3200) 1220,3200 ; 1234.42,200 ccw(c1100,200) 1234.42,200 ; 4734.42,200 ccw(c4600,200) 4734.42,200 ; 4734.42,3200 ccw(c4600,3200) 4734.42,3200
  Bottom Layer w10: 1220,3200 ccw(c1085.58,3200) 1220,3200 ; 1234.42,200 ccw(c1100,200) 1234.42,200 ; 4734.42,200 ccw(c4600,200) 4734.42,200 ; 4734.42,3200 ccw(c4600,3200) 4734.42,3200

## Polygon pours and split planes (outlines as drawn)
Vled on Top Layer "Top Layer-Vled" (solid, pour order 4): 2898.53,0 2900,1.47 2900,3400 6460,3400 6560,3300 6560,100 6460,0
5V on Top Layer "Top Layer-5V" (solid, pour order 10): 100,0 0,100 0,3300 100,3400 2800,3400 2800,0
GND on Bottom Layer "Bottom Layer - GND" (solid, pour order 8): 0,100 0,3300 100,3400 6460,3400 6560,3300 6560,100 6460,0 100,0

## Other copper
Top Layer:
  text "Audio Out" at 2040,3380 h60 r180
  text "Laser Harp V0" at 2429.65,3240 h80
  text "Sensor 1" at 20,3083.43 h80 r270
  text "Laser 1" at 6520,2931.57 h80 r90
  text "Sensor 2" at 20,2688.43 h80 r270
  text "Laser 2" at 6525.61,2536.57 h80 r90
  text "Sensor 3" at 20,2293.43 h80 r270
  text "Laser 3" at 6525.61,2141.57 h80 r90
  text "Sensor 4" at 20,1898.43 h80 r270
  text "Laser 4" at 6531.22,1746.57 h80 r90
  text "Sensor 5" at 20,1503.43 h80 r270
  text "Laser 5" at 6531.28,1351.57 h80 r90
  text "Sensor 6" at 14.11,1108.43 h80 r270
  text "Laser 6" at 6531.28,956.57 h80 r90
  text "Sensor 7" at 14.11,713.43 h80 r270
  text "Laser 7" at 6531.28,561.57 h80 r90
  text "Synth" at 3790.17,500 h60
  text "Vled" at 4129.65,500 h60
  text "5V" at 1825,490 h60
  text "Sensor 8" at 14.11,380 h80 r270
  text "Laser 8" at 6531.28,171.57 h80 r90
  text "1" at 2940,20 h60
  text "1" at 2101,15 h60
  text "1" at 4297.36,15.43 h60

## Silkscreen, mask and mechanical layers (free items; w line width, h text height)
Top Overlay:
  lines w10: 1745,2625 1770,2600 2395,2600 2420,2575 2445,2600 3145,2600 3170,2625 ; 2070,1100 2095,1125 2270,1125 2295,1150 2320,1125 2495,1125 2520,1100 ; 2670,1100 2695,1125 3470,1125 3495,1150 3520,1125 4262.93,1125 4282.7,1105.23 ; 3020,2700 3045,2675 3545,2675 3570,2650 3595,2675 4070,2675 4095,2700
  text "5V" at 4245,2850 h20 r315
  text "5V" at 4545,2825 h20 r45
  text "PWM2" at 2970,2775 h20 r225
  text "TX0" at 3070,2775 h20 r225
  text "RX0" at 3170,2775 h20 r225
  text "TX3" at 3370,2775 h20 r225
  text "RX3" at 3470,2775 h20 r225
  text "TX2" at 3570,2775 h20 r225
  text "RX2" at 3670,2775 h20 r225
  text "TX1" at 3770,2775 h20 r225
  text "RX1" at 3870,2775 h20 r225
  text "SDA" at 3970,2775 h20 r225
  text "SCL" at 4070,2775 h20 r225
  text "AREF" at 1610,2770 h20 r225
  text "GND" at 1710,2770 h20 r225
  text "PWM13" at 1810,2770 h20 r225
  text "PWM12" at 1910,2770 h20 r225
  text "PWM11" at 2010,2770 h20 r225
  text "PWM10" at 2110,2770 h20 r225
  text "PWM9" at 2210,2770 h20 r225
  text "PWM8" at 2310,2770 h20 r225
  text "PWM7" at 2470,2767.93 h20 r225
  text "PWM6" at 2570,2767.93 h20 r225
  text "PWM5" at 2670,2767.93 h20 r225
  text "PWM4" at 2770,2767.93 h20 r225
  text "PWM3" at 2870,2767.93 h20 r225
  text "22" at 4245,2750 h20 r315
  text "23" at 4545,2725 h20 r45
  text "24" at 4245,2650 h20 r315
  text "25" at 4545,2625 h20 r45
  text "26" at 4245,2550 h20 r315
  text "27" at 4545,2525 h20 r45
  text "28" at 4245,2450 h20 r315
  text "29" at 4545,2425 h20 r45
  text "30" at 4245,2350 h20 r315
  text "31" at 4545,2325 h20 r45
  text "32" at 4245,2250 h20 r315
  text "33" at 4545,2225 h20 r45
  text "34" at 4245,2150 h20 r315
  text "35" at 4545,2125 h20 r45
  text "36" at 4245,2050 h20 r315
  text "37" at 4545,2025 h20 r45
  text "38" at 4245,1950 h20 r315
  text "39" at 4545,1925 h20 r45
  text "40" at 4245,1850 h20 r315
  text "41" at 4545,1825 h20 r45
  text "42" at 4245,1750 h20 r315
  text "43" at 4545,1725 h20 r45
  text "44" at 4245,1650 h20 r315
  text "45" at 4545,1625 h20 r45
  text "46" at 4245,1550 h20 r315
  text "47" at 4545,1525 h20 r45
  text "48" at 4245,1450 h20 r315
  text "49" at 4545,1425 h20 r45
  text "50" at 4245,1350 h20 r315
  text "51" at 4545,1325 h20 r45
  text "52" at 4245,1250 h20 r315
  text "53" at 4545,1225 h20 r45
  text "GND" at 4245,1150 h20 r315
  text "GND" at 4545,1125 h20 r45
  text "RESET" at 1970,1025 h20 r45
  text "3v3" at 2070,1025 h20 r45
  text "5v" at 2170,1025 h20 r45
  text "GND" at 2270,1025 h20 r45
  text "GND" at 2370,1025 h20 r45
  text "Vin" at 2470,1025 h20 r45
  text "AD0" at 2670,1025 h20 r45
  text "AD1" at 2770,1025 h20 r45
  text "AD2" at 2870,1025 h20 r45
  text "AD3" at 2970,1025 h20 r45
  text "AD4" at 3070,1025 h20 r45
  text "AD5" at 3170,1025 h20 r45
  text "AD6" at 3270,1025 h20 r45
  text "AD7" at 3370,1025 h20 r45
  text "AD8" at 3570,1025 h20 r45
  text "AD9" at 3670,1025 h20 r45
  text "AD10" at 3770,1025 h20 r45
  text "AD11" at 3870,1025 h20 r45
  text "AD12" at 3970,1025 h20 r45
  text "AD13" at 4070,1025 h20 r45
  text "AD14" at 4170,1025 h20 r45
  text "AD15" at 4270,1025 h20 r45
Mechanical 1:
  circle w5: c4470,950 r62.99
  circle w5: c4220,2850 r62.99
  circle w5: c3270,2250 r62.99
  circle w5: c1220,950 r62.99
  circle w5: c3270,1150 r62.99
  circle w5: c1270,2850 r62.99
Mechanical 32:
  the board outline again, w10

## Text inside footprints (layer, text, board x,y; h text height)
J1: Mechanical 4 "VALUE" at 2210.51,518.9 h73.82 r180; Mechanical 4 "NAME" at 2210.28,67.99 h73.82 r180; Mechanical 4 "VALUE" at 2210.51,518.9 h73.82 r180; Mechanical 4 "NAME" at 2210.28,67.99 h73.82 r180
J2: Mechanical 4 "VALUE" at 4395.87,518.9 h73.82 r180; Mechanical 4 "NAME" at 4395.64,67.99 h73.82 r180; Mechanical 4 "VALUE" at 4395.87,518.9 h73.82 r180; Mechanical 4 "NAME" at 4395.64,67.99 h73.82 r180
J3_Laser1: Mechanical 4 "NAME" at 6450.43,3230.28 h73.82 r270; Mechanical 4 "VALUE" at 5999.53,3230.51 h73.82 r270; Mechanical 4 "NAME" at 6450.43,3230.28 h73.82 r270; Mechanical 4 "VALUE" at 5999.53,3230.51 h73.82 r270
J3_Laser2: Mechanical 4 "NAME" at 6450.43,2835.28 h73.82 r270; Mechanical 4 "VALUE" at 5999.53,2835.51 h73.82 r270; Mechanical 4 "NAME" at 6450.43,2835.28 h73.82 r270; Mechanical 4 "VALUE" at 5999.53,2835.51 h73.82 r270
J3_Laser3: Mechanical 4 "NAME" at 6450.43,2440.28 h73.82 r270; Mechanical 4 "VALUE" at 5999.53,2440.51 h73.82 r270; Mechanical 4 "NAME" at 6450.43,2440.28 h73.82 r270; Mechanical 4 "VALUE" at 5999.53,2440.51 h73.82 r270
J3_Laser4: Mechanical 4 "NAME" at 6450.43,2045.28 h73.82 r270; Mechanical 4 "VALUE" at 5999.53,2045.51 h73.82 r270; Mechanical 4 "NAME" at 6450.43,2045.28 h73.82 r270; Mechanical 4 "VALUE" at 5999.53,2045.51 h73.82 r270
J3_Laser5: Mechanical 4 "NAME" at 6450.43,1650.28 h73.82 r270; Mechanical 4 "VALUE" at 5999.53,1650.51 h73.82 r270; Mechanical 4 "NAME" at 6450.43,1650.28 h73.82 r270; Mechanical 4 "VALUE" at 5999.53,1650.51 h73.82 r270
J3_Laser6: Mechanical 4 "NAME" at 6450.43,1255.28 h73.82 r270; Mechanical 4 "VALUE" at 5999.53,1255.51 h73.82 r270; Mechanical 4 "NAME" at 6450.43,1255.28 h73.82 r270; Mechanical 4 "VALUE" at 5999.53,1255.51 h73.82 r270
J3_Laser7: Mechanical 4 "NAME" at 6450.43,860.28 h73.82 r270; Mechanical 4 "VALUE" at 5999.53,860.51 h73.82 r270; Mechanical 4 "NAME" at 6450.43,860.28 h73.82 r270; Mechanical 4 "VALUE" at 5999.53,860.51 h73.82 r270
J3_Laser8: Mechanical 4 "NAME" at 6450.43,470.28 h73.82 r270; Mechanical 4 "VALUE" at 5999.53,470.51 h73.82 r270; Mechanical 4 "NAME" at 6450.43,470.28 h73.82 r270; Mechanical 4 "VALUE" at 5999.53,470.51 h73.82 r270
J4: Mechanical 4 "NAME" at 1609.72,3310.44 h73.82; Mechanical 4 "VALUE" at 1609.49,2859.53 h73.82; Mechanical 4 "NAME" at 1609.72,3310.44 h73.82; Mechanical 4 "VALUE" at 1609.49,2859.53 h73.82
J11_Photoresistor1: Mechanical 4 "NAME" at 89.57,2784.72 h73.82 r90; Mechanical 4 "VALUE" at 540.47,2784.5 h73.82 r90; Mechanical 4 "NAME" at 89.57,2784.72 h73.82 r90; Mechanical 4 "VALUE" at 540.47,2784.5 h73.82 r90
J11_Photoresistor2: Mechanical 4 "NAME" at 89.57,2389.72 h73.82 r90; Mechanical 4 "VALUE" at 540.47,2389.5 h73.82 r90; Mechanical 4 "NAME" at 89.57,2389.72 h73.82 r90; Mechanical 4 "VALUE" at 540.47,2389.5 h73.82 r90
J11_Photoresistor3: Mechanical 4 "NAME" at 89.57,1994.72 h73.82 r90; Mechanical 4 "VALUE" at 540.47,1994.5 h73.82 r90; Mechanical 4 "NAME" at 89.57,1994.72 h73.82 r90; Mechanical 4 "VALUE" at 540.47,1994.5 h73.82 r90
J11_Photoresistor4: Mechanical 4 "NAME" at 89.57,1599.72 h73.82 r90; Mechanical 4 "VALUE" at 540.47,1599.5 h73.82 r90; Mechanical 4 "NAME" at 89.57,1599.72 h73.82 r90; Mechanical 4 "VALUE" at 540.47,1599.5 h73.82 r90
J11_Photoresistor5: Mechanical 4 "NAME" at 89.57,1204.72 h73.82 r90; Mechanical 4 "VALUE" at 540.47,1204.5 h73.82 r90; Mechanical 4 "NAME" at 89.57,1204.72 h73.82 r90; Mechanical 4 "VALUE" at 540.47,1204.5 h73.82 r90
J11_Photoresistor6: Mechanical 4 "NAME" at 89.57,809.72 h73.82 r90; Mechanical 4 "VALUE" at 540.47,809.5 h73.82 r90; Mechanical 4 "NAME" at 89.57,809.72 h73.82 r90; Mechanical 4 "VALUE" at 540.47,809.5 h73.82 r90
J11_Photoresistor7: Mechanical 4 "NAME" at 89.57,414.72 h73.82 r90; Mechanical 4 "VALUE" at 540.47,414.5 h73.82 r90; Mechanical 4 "NAME" at 89.57,414.72 h73.82 r90; Mechanical 4 "VALUE" at 540.47,414.5 h73.82 r90
J11_Photoresistor8: Mechanical 4 "NAME" at 89.57,19.72 h73.82 r90; Mechanical 4 "VALUE" at 540.47,19.5 h73.82 r90; Mechanical 4 "NAME" at 89.57,19.72 h73.82 r90; Mechanical 4 "VALUE" at 540.47,19.5 h73.82 r90
U1_Laser1: Mechanical 13 "TAB" at 5643.75,3062.5 h25 r180
U1_Laser2: Mechanical 13 "TAB" at 5643.75,2667.5 h25 r180
U1_Laser3: Mechanical 13 "TAB" at 5643.75,2272.5 h25 r180
U1_Laser4: Mechanical 13 "TAB" at 5643.75,1877.5 h25 r180
U1_Laser5: Mechanical 13 "TAB" at 5643.75,1482.5 h25 r180
U1_Laser6: Mechanical 13 "TAB" at 5643.75,1087.5 h25 r180
U1_Laser7: Mechanical 13 "TAB" at 5643.75,692.5 h25 r180
U1_Laser8: Mechanical 13 "TAB" at 5643.75,302.5 h25 r180
U5_Laser1: Mechanical 13 "TAB" at 5151.25,2997.5 h25
U5_Laser2: Mechanical 13 "TAB" at 5151.25,2602.5 h25
U5_Laser3: Mechanical 13 "TAB" at 5151.25,2207.5 h25
U5_Laser4: Mechanical 13 "TAB" at 5151.25,1812.5 h25
U5_Laser5: Mechanical 13 "TAB" at 5151.25,1417.5 h25
U5_Laser6: Mechanical 13 "TAB" at 5151.25,1022.5 h25
U5_Laser7: Mechanical 13 "TAB" at 5151.25,627.5 h25
U5_Laser8: Mechanical 13 "TAB" at 5151.25,237.5 h25